# Altium PCB DAQ_1.PcbDoc
Units mm, origin at the board's own origin, x right, y up, seen from the top; angles counter-clockwise.
Board outline 50 x 50 mm, 2 copper layers (Top Layer, Bottom Layer); 40 components, 35 nets, 126 pads, 0 vias.
Unrouted connection lines stored in the file: 81.
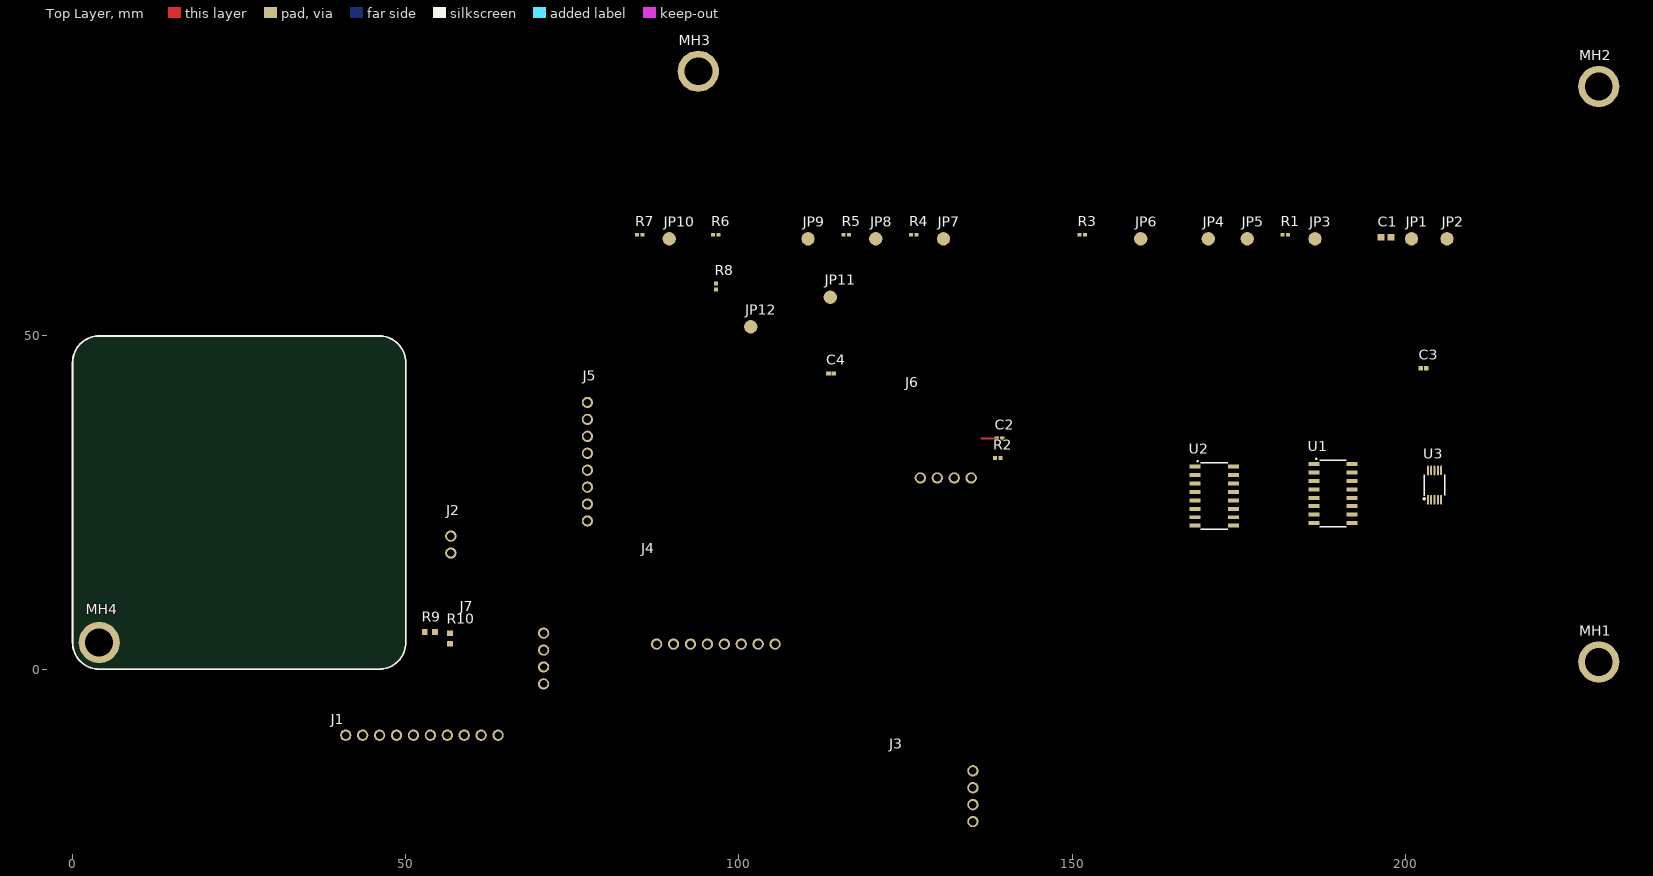
[diagram p0: Top Layer view]
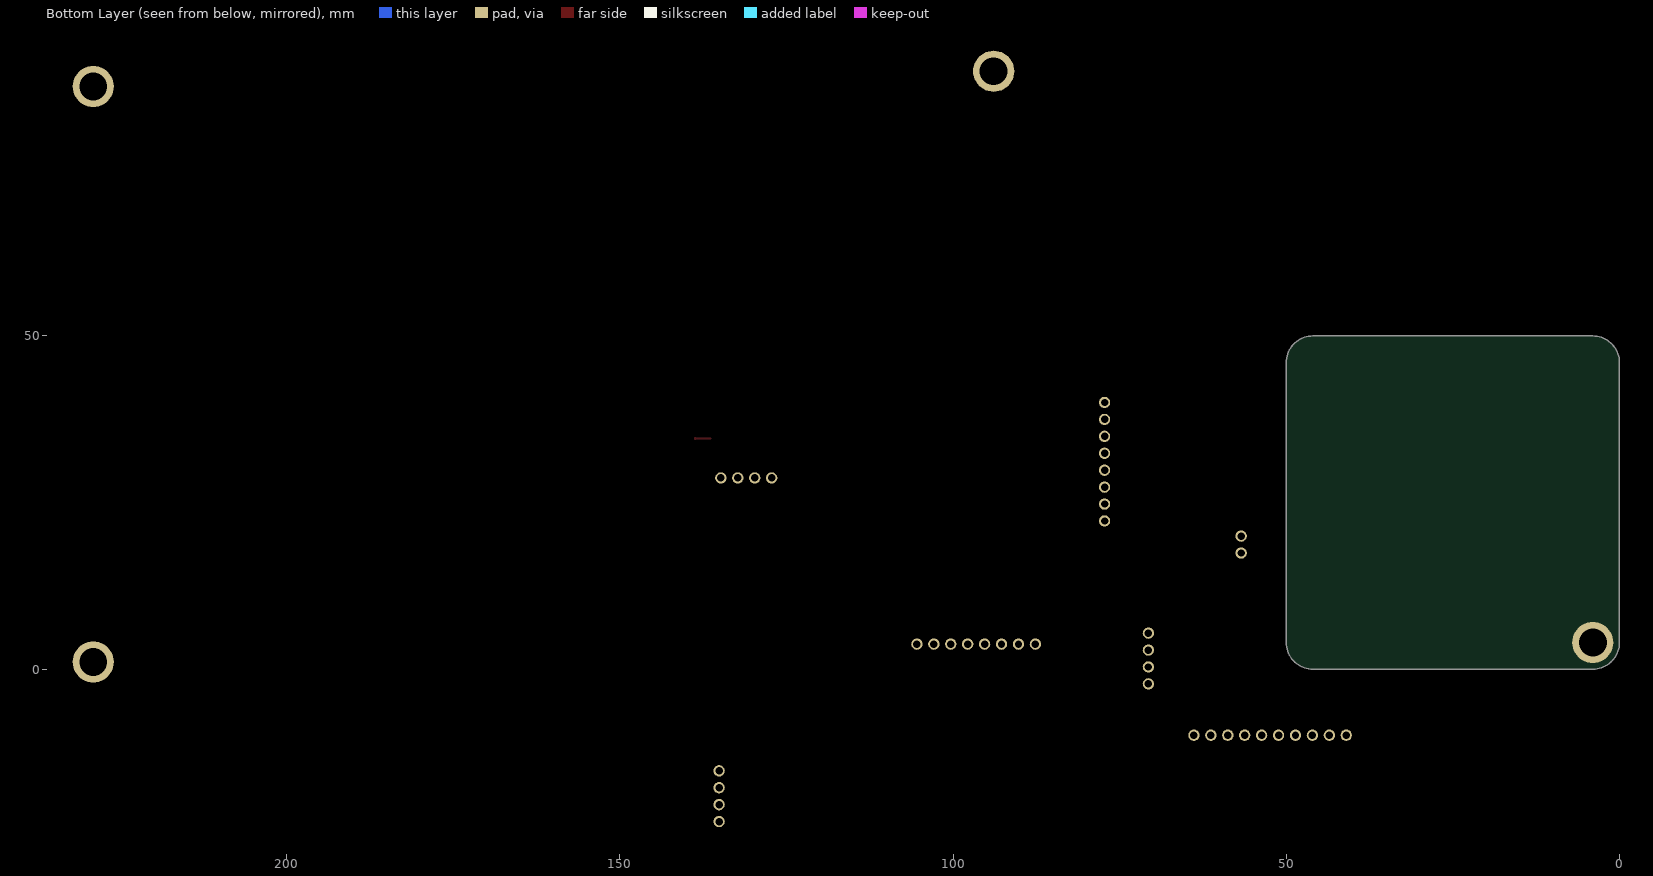
[diagram p1: Bottom Layer view, seen from below]

## Layer stack, top to bottom
Top Solder: solder mask 0.0102, Solder Resist, Dk 3.5
Top Layer: signal copper 0.0356
Dielectric 1: dielectric 0.32, FR-4, Dk 4.8
Bottom Layer: signal copper 0.0356
Bottom Solder: solder mask 0.0102, Solder Resist, Dk 3.5

## Board outline
0,4 0,46 cw(c4,46) 4,50 46,50 cw(c46,46) 50,46 50,4 cw(c46,4) 46,0 4,0 cw(c4,4)

## Design rules (kind name [scope] priority, off if disabled: settings)
BoardOutlineClearance [All] p1: gap=0.2 ignorepadtopadclearanceinfootprint=FALSE
Clearance "Stitching HV_GND" [IsStitchingVia and InNet('HV_GND') vs (IsVia and (Not IsStitchingVia)) Or IsPad] p1: gap=0.127 ignorepadtopadclearanceinfootprint=FALSE
Clearance [All] p2: gap=0.127 ignorepadtopadclearanceinfootprint=FALSE except(0.2: Arc-SMDPad Track-SMDPad; 0.25: Arc-Hole Track-Hole SMDPad-Hole THPad-Hole Via-Hole Fill-Hole Poly-Hole Region-Hole Text-Hole; 0.254: Arc-Via Track-Via Via-Via; 0.33: Arc-THPad Track-THPad; 0.54: SMDPad-THPad THPad-THPad)
ComponentClearance [All] p1: gap=0.127 collisioncheckmode=3 verticalgap=0.127 showdistances=TRUE
DiffPairsRouting [All] p1: maxlimit=0.254 minlimit=0.127 mostfreqgap=0.127 toplayer_minwidth=0.127 toplayer_maxwidth=25.4 toplayer_prefwidth=0.127 bottomlayer_minwidth=0.127 bottomlayer_maxwidth=25.4 bottomlayer_prefwidth=0.127 maxuncoupledlength=12.7
Height [All] p1: minheight=0 maxheight=1816.048 prefheight=12.7
HoleSize [All] p1: absolutevalues=TRUE maxlimit=6.3 minlimit=0.3 maxpercent=80.000 minpercent=20.000
HoleToHoleClearance [All] p1: gap=0.25 allowstackedmicrovias=FALSE
MinimumAnnularRing [All] p1: minimumring=0.076
MinimumSolderMaskSliver [All] p1: minsoldermaskwidth=0
PlaneClearance [All] p1: clearance=0.127
PlaneConnect PlaneConnectPowerPads [InPadClass('PowerPads')] p1: planeconnectstyle=Direct reliefexpansion=0.508 reliefentries=4 reliefconductorwidth=0.254 reliefairgap=0.254
PlaneConnect [All] p2: pad.planeconnectstyle=Relief pad.reliefexpansion=0.3 pad.reliefentries=4 pad.reliefconductorwidth=0.254 pad.reliefairgap=0.127 via.planeconnectstyle=Direct via.reliefexpansion=0.3 via.reliefentries=4 via.reliefconductorwidth=0.127 via.reliefairgap=0.127
PolygonConnect PolygonConnectPowerPads [All vs (InPadClass('PowerPads'))] p1: connectstyle=Direct reliefconductorwidth=0.254 reliefentries=4 polygonreliefangle="90 Angle" airgapwidth=0.254
PolygonConnect [All] p2: thpad.connectstyle=Relief thpad.reliefconductorwidth=0.203 thpad.reliefentries=4 thpad.polygonreliefangle="90 Angle" thpad.airgapwidth=0.254 smdpad.connectstyle=Relief smdpad.reliefconductorwidth=0.203 smdpad.reliefentries=4 smdpad.polygonreliefangle="90 Angle" smdpad.airgapwidth=0.254 via.connectstyle=Direct via.reliefconductorwidth=0.203 via.reliefentries=4 via.polygonreliefangle="90 Angle" via.airgapwidth=0.254
RoutingVias [All] p1: holewidth=0.45 width=0.75 viastyle="Through Hole" minholewidth=0.3 minwidth=0.6 maxholewidth=0.6 maxwidth=6.6
SilkToSilkClearance [All] p1: silktosilkclearance=0
SilkToSolderMaskClearance [IsPad] p1: minsilkscreentomaskgap=0.127 clearancetoexposedcopper=TRUE
SolderMaskExpansion SolderMaskExpansion_Via [IsVia] p1: expansion=0.102 istentingtop=TRUE
SolderMaskExpansion [All] p2: expansion=0.075 istentingtop=FALSE
Width [All] p1: maxlimit=25.4 minlimit=0.2 preferedwidth=0.406 minimp=50.000000 maximp=50.000000 favimp=50.000000
20 further rules are at their usual default settings.

## Classes and differential pairs
component class root: C1 C2 C3 J1 J2 J3 J5 J7 JP1 JP2 JP3 JP4 JP5 JP6 JP7 JP8 JP9 JP10 JP11 JP12 MH1 MH2 MH3 MH4 R3 R4 R5 R6 R7 R8 U1 U2

## Components (designator, comment, footprint, x,y, rotation, side; value= is the part's Value field where it differs from the comment)
C1 "1uF" CAP-0603 197.107,64.836 r0 top
C2 "0.1uF" CAP-0402 139.106,34.61 r180 top
C3 "0.1uF" CAP-0402 202.733,45.151 r0 top
C4 "0.1uF" CAP-0402 113.833,44.389 r0 top
J1 "WM4932-ND" 10PIN 40.99,-9.91 r0 top
J2 "WM4153-ND" 2PIN 56.76,17.43 r90 top
J3 "WM4902-ND" 4PIN 135.1,-15.25 r270 top
J4 "23-0705530112-ND" 8PIN 105.42,3.76 r180 top
J5 "23-0705530112-ND" 8PIN 77.26,22.24 r90 top
J6 "WM4902-ND" 4PIN 134.84,28.7 r180 top
J7 "WM4902-ND" 4PIN 70.68,5.41 r270 top
JP1 "Testpoint2" TP2 200.917,64.582 r0 top
JP2 "Testpoint2" TP2 206.251,64.582 r0 top
JP3 "Testpoint2" TP2 186.439,64.582 r0 top
JP4 "Testpoint2" TP2 170.437,64.582 r0 top
JP5 "Testpoint2" TP2 176.279,64.582 r0 top
JP6 "Testpoint2" TP2 160.277,64.582 r0 top
JP7 "Testpoint2" TP2 130.686,64.582 r0 top
JP8 "Testpoint2" TP2 120.526,64.582 r0 top
JP9 "Testpoint2" TP2 110.366,64.582 r0 top
JP10 "Testpoint2" TP2 89.538,64.582 r90 top
JP11 "Testpoint2" TP2 113.706,55.819 r90 top
JP12 "Testpoint2" TP2 101.768,51.374 r90 top
MH1 "MountingHole" MH4.2MM#1 229.022,1.082 r0 top
MH2 "MountingHole" MH4.2MM#1 229.022,87.442 r0 top
MH3 "MountingHole" MH4.2MM#1 93.894,89.728 r0 top
MH4 "MountingHole" MH4.2MM#2 9.23,6.75 r0 top
R1 "330R" RES-0402 181.994,65.217 r0 top
R2 "330R" RES-0402 138.852,31.689 r0 top
R3 "330R" RES-0402 151.514,65.217 r0 top
R4 "330R" RES-0402 126.241,65.217 r0 top
R5 "330R" RES-0402 116.081,65.217 r0 top
R6 "330R" RES-0402 96.523,65.217 r0 top
R7 "330R" RES-0402 85.093,65.217 r0 top
R8 "330R" RES-0402 96.561,57.426 r90 top
R9 "5K" RES-0603 53.6,5.6 r0 top
R10 "5K" RES-0603 56.6,4.6 r90 top
U1 "74HCT151" SOT127P400X1000-16N 189.144,26.355 r0 top
U2 "74HCT153" SOT127P400X1000-16N 171.318,25.974 r0 top
U3 "ADS1113" VSSOP50P310X310-10P 204.384,27.625 r90 top

## Footprints (in the part's own frame and the unit in brackets; to place one, negate y for a bottom-side part, rotate by r counter-clockwise, add the part's x,y. Pads: shape width x height; smd on the part's side, far side on the other; paste and mask are expansions set on the pad)
2PIN [mm]
  round 1.7 hole 1.11: 1(0,0) 2(2.54,0)
  body extent -2.48,-12.89 4.88,0.7, height 7.06
4PIN [mm]
  round 1.7 hole 1.11: 1(0,0) 2(2.54,0) 3(5.08,0) 4(7.62,0)
  body extent -2.55,-12.82 10.15,0.77, height 7.06
8PIN [mm]
  round 1.7 hole 1.11: 1(0,0) 2(2.54,0) 3(5.08,0) 4(7.62,0) 5(10.16,0) 6(12.7,0) 7(15.24,0) 8(17.78,0)
  body extent -2.56,-12.89 20.3,0.7, height 7.06
10PIN [mm]
  round 1.7 hole 1.11: 1(0,0) 2(2.54,0) 3(5.08,0) 4(7.62,0) 5(10.16,0) 6(12.7,0) 7(15.24,0) 8(17.78,0) 9(20.32,0) 10(22.86,0)
  body extent -2.54,-12.89 25.4,0.69, height 7.06
CAP-0402 [mm] "Chip Capacitor, 2-Leads, Body 1.00x0.50mm, IPC Medium Density"
  rect 0.7x0.62 smd: 1(-0.41,0) 2(0.41,0)
  body extent -0.53,-0.28 0.53,0.28, height 0.55
CAP-0603 [mm] "Chip Capacitor, 2-Leads, Body 1.60x0.80mm, IPC Medium Density"
  rect 1.05x1 smd: 1(-0.75,0) 2(0.75,0)
  body extent -0.87,-0.48 0.87,0.48, height 0.9
MH4.2MM#1 [mm] "Mounting Hole, 4.2mm"
  round 6.2 hole 4.2: 1(0,0)
MH4.2MM#2 [mm] "Mounting Hole, 4.2mm"
  round 6.2 hole 4.2: 1(-5.23,-2.75)
RES-0402 [mm] "Chip Resistor, 2-Leads, Body 1.00x0.50mm, IPC Medium Density"
  rect 0.6x0.55 smd: 1(-0.425,0) 2(0.425,0)
  body extent -0.53,-0.28 0.53,0.28, height 0.4
RES-0603 [mm] "Chip Resistor, 2-Leads, Body 1.60x0.80mm, IPC Medium Density"
  rect 0.85x0.9 smd: 1(-0.775,0) 2(0.775,0)
  body extent -0.85,-0.45 0.85,0.45, height 0.55
SOT127P400X1000-16N [mm] "SOT109, 16-Leads, Body 4x10mm (max), Pitch 1.27mm, IPC Medium Density"
  rect 1.65x0.6 smd mask+0.07: 1(-2.875,4.445) 2(-2.875,3.175) 3(-2.875,1.905) 4(-2.875,0.635) 5(-2.875,-0.635) 6(-2.875,-1.905) 7(-2.875,-3.175) 8(-2.875,-4.445) 9(2.875,-4.445) 10(2.875,-3.175) 11(2.875,-1.905) 12(2.875,-0.635) 13(2.875,0.635) 14(2.875,1.905) 15(2.875,3.175) 16(2.875,4.445)
  silkscreen extent -2.58,-5 2,5.32, body extent -2.01,-5 1.99,4.99, height 0.95
TP2 [mm]
  round 2 smd: 1(0,0)
VSSOP50P310X310-10P [mm] "VSSOP, 10-Leads, Body 3.1x3.1mm (max), Pitch 0.50mm, IPC Low Density"
  oval 1.45x0.3 smd: 1(-2.2,1) 2(-2.2,0.5) 3(-2.2,0) 4(-2.2,-0.5) 5(-2.2,-1) 6(2.2,-1) 7(2.2,-0.5) 8(2.2,0) 9(2.2,0.5) 10(2.2,1)
  silkscreen extent -2.17,-1.55 1.55,1.67, body extent -1.55,-1.55 1.55,1.55, height 1.1

## Part data
C1: library part 0603-1uF-16V, "CAP CER 1UF 16V X7R 0603", Case Code (Imperial)=0603, Case Code (Metric)=1608, Dielectric=X7R, Dielectric Material=Ceramic, Manufacturer=KEMET, Manufacturer Part Number=C0603C105K4RACTU, Max Operating Temperature=125°C, Min Operating Temperature=-55°C, Package Quantity=4000, Supplier Part Number 1=399-7847-6-ND, Tolerance=10%, Voltage=16V, Capacitance=1uF, Case/Package=0603, ComponentLink1Description=http://www.mouser.com/ds/2/212/KEM_C1002_X7R_SMD-1102033.pdf?src-supplier=Mouser, ComponentLink1URL=http://www.mouser.com/ds/2/212/KEM_C1002_X7R_SMD-1102033.pdf?src-supplier=Mouser, ComponentLink2Description=http://www.kemet.com/kemet/web/homepage/kechome.nsf/file/Commercial%20Ceramic%20Chips%20X7R%20Dielectric/$file/KEM_C1002_X7R_SMD.pdf?src-supplier=Element14, ComponentLink2URL=http://www.kemet.com/kemet/web/homepage/kechome.nsf/file/Commercial%20Ceramic%20Chips%20X7R%20Dielectric/$file/KEM_C1002_X7R_SMD.pdf?src-supplier=Element14, ComponentLink3Description=https://www.verical.com/server-webapp/html/getDatasheet?partID=385479&src-supplier=Verical, ComponentLink3URL=https://www.verical.com/server-webapp/html/getDatasheet?partID=385479&src-supplier=Verical, ComponentLink4Description=http://www.kemet.com/kemet/web/homepage/kechome.nsf/vapubfiles/KEM_C1002_X7R_SMD.pdf/$file/KEM_C1002_X7R_SMD.pdf?src-supplier=Element14, ComponentLink4URL=http://www.kemet.com/kemet/web/homepage/kechome.nsf/vapubfiles/KEM_C1002_X7R_SMD.pdf/$file/KEM_C1002_X7R_SMD.pdf?src-supplier=Element14, Contact Plating=Tin,Matte, Depth=0.8mm, Dissipation Factor=3.5%, Height=0.8mm, Length=1.6mm, Mount="Surface Mount,PCB", Number of Pins=2, Packaging="Tape and Reel", Pricing 1="1=0.12, 10=0.088, 100=0.0391, 500=0.02792, 1000=0.02193 (USD)", Radiation Hardening=No, REACH SVHC="No SVHC", Stock 1=600463, Supplier 1=Digi-Key, Termination=SMD/SMT, Thickness=0.034inch, Voltage Rating=16V, Voltage Rating (DC)=16V, Width=0.031inch
C2 C3 C4: library part 0402-0.1uF-16V, "CAP CER 0.1UF 16V Y5V 0402", Capacitance=100nF, Case/Package=0402, Dielectric=Y5V, Dielectric Material=Ceramic, Manufacturer=KEMET, Manufacturer Part Number=C0402C104Z4VACTU, Max Operating Temperature=85°C, Min Operating Temperature=-30°C, Supplier Part Number 1=399-1043-6-ND, Tolerance=80%, Voltage Rating (DC)=16V, ComponentLink1Description=https://www.verical.com/server-webapp/html/getDatasheet?partID=764272&src-supplier=Verical, ComponentLink1URL=https://www.verical.com/server-webapp/html/getDatasheet?partID=764272&src-supplier=Verical, Depth=0.5mm, Height=0.5mm, Lead Free="Lead Free", Length=1mm, Mount="Surface Mount", Packaging="Tape and Reel", Pricing 1="1=0.1, 10=0.018, 100=0.0081, 500=0.00578, 1000=0.00454, 2500=0.00412, 5000=0.0038 (USD)", Radiation Hardening=No, Stock 1=1836776, Supplier 1=Digi-Key
J1: library part 10PIN, "CONN HEADER R/A 10POS 2.54MM", Color=Black, Contact Resistance=30mR, Manufacturer=Molex, Manufacturer Part Number=0705530044, Max Operating Temperature=105°C, Min Operating Temperature=-40°C, ComponentLink1Description=http://www.molex.com/webdocs/datasheets/pdf/en-us/0705530044_PCB_HEADERS.pdf?src-supplier=Avnet, ComponentLink1URL=http://www.molex.com/webdocs/datasheets/pdf/en-us/0705530044_PCB_HEADERS.pdf?src-supplier=Avnet, Connector Type="Male Pin", Contact Material=Bronze, Contact Mating Length=0.24inch, Contact Plating=Tin, Depth=13.59mm, Gender=Male, Housing Color=Black, Housing Material=Polyester, Length=27.95mm, Mount="Through Hole", Number of Contacts=10, Number of Positions=10, Number of Rows=1, Orientation="Right Angle", Packaging=Rail/Tube, Pitch=2.54mm, Pricing 1="1=2.61, 10=2.367, 100=2.0288, 500=1.69068, 1000=1.44915, 5000=1.28491 (USD)", Stock 1=1173, Supplier 1=Digi-Key, Supplier Part Number 1=WM4932-ND, Termination=Solder
J2: library part 2PIN, "CONN HEADER R/A 2POS 2.54MM", Color=Black, Contact Resistance=30mR, Manufacturer=Molex, Manufacturer Part Number=0705530106, Max Operating Temperature=105°C, Min Operating Temperature=-40°C, ComponentLink1Description=http://www.molex.com/webdocs/datasheets/pdf/en-us/0705530106_PCB_HEADERS.pdf?src-supplier=Avnet+Asia, ComponentLink1URL=http://www.molex.com/webdocs/datasheets/pdf/en-us/0705530106_PCB_HEADERS.pdf?src-supplier=Avnet+Asia, ComponentLink2Description=https://www.molex.com/pdm_docs/ps/PS-70400.pdf?src-supplier=Digi-Key, ComponentLink2URL=https://www.molex.com/pdm_docs/ps/PS-70400.pdf?src-supplier=Digi-Key, Connector Type="Male Pin", Contact Material=Bronze, Contact Mating Length=0.24inch, Contact Plating=Gold, Depth=13.59mm, Housing Color=Black, Housing Material=Polyester, Length=7.37mm, Mount="Through Hole", Number of Contacts=2, Number of Positions=2, Number of Rows=1, Orientation="Right Angle", Packaging=Rail/Tube, Pitch=2.54mm, Pricing 1="1=1.38, 10=1.25, 100=1.071, 500=0.8925, 1000=0.765, 5000=0.6783, 10000=0.663 (USD)", Stock 1=2224, Supplier 1=Digi-Key, Supplier Part Number 1=WM4153-ND, Termination=Solder
J3 J6 J7: library part 4PIN, "CONN HEADER R/A 4POS 2.54MM", Color=Black, Contact Resistance=30mR, Current Rating=3A, Flammability Rating="UL94 V-0", Insulation Resistance=1GR, Manufacturer=Molex, Manufacturer Part Number=70553-0003, Max Operating Temperature=105°C, Min Operating Temperature=-40°C, Package Quantity=1680, Voltage Rating=250V, Approvals=UL,CSA, ComponentLink1Description=http://www.molex.com/webdocs/datasheets/pdf/en-us/0705530003_PCB_HEADERS.pdf?src-supplier=Mouser, ComponentLink1URL=http://www.molex.com/webdocs/datasheets/pdf/en-us/0705530003_PCB_HEADERS.pdf?src-supplier=Mouser, ComponentLink2Description=http://www.jameco.com/Jameco/Products/ProdDS/884758.pdf?src-supplier=Jameco, ComponentLink2URL=http://www.jameco.com/Jameco/Products/ProdDS/884758.pdf?src-supplier=Jameco, ComponentLink3Description=http://uk.rs-online.com/webdocs/13c4/0900766b813c4977.pdf?src-supplier=RSComponents, ComponentLink3URL=http://uk.rs-online.com/webdocs/13c4/0900766b813c4977.pdf?src-supplier=RSComponents, Contact Material="Bronze,Copper Alloy", Contact Plating=Gold, ELV=Compliant, Gender=Male, Glow Wire Compliant=Non-compliant, Housing Color=Black, Housing Material=Polycyclohexylenedimethylene, Lead Free="Lead Free", Material=Brass, Mount="Through Hole", Number of Circuits=4, Number of Contacts=4, Number of Positions=4, Number of Rows=1, Orientation="Right Angle", Packaging=Rail/Tube, Pitch=2.54mm, Pricing 1="1=1.05, 10=0.927, 100=0.7995, 500=0.65412, 1000=0.58144, 5000=0.50876, 10000=0.48332 (USD)", REACH SVHC=Unknown, Stock 1=4238, Supplier 1=Digi-Key, Supplier Part Number 1=WM4902-ND, Termination="Through Hole", Voltage Rating (DC)=250V
J4 J5: library part 8PIN, "CONN HEADER R/A 8POS 2.54MM", Color=Black, Contact Resistance=30mR, Current Rating=3A, Flammability Rating="UL94 V-0", Insulation Resistance=1GR, Manufacturer=Molex, Manufacturer Part Number=70553-0112, Max Operating Temperature=105°C, Min Operating Temperature=-40°C, Package Quantity=1, Voltage Rating=250V, ComponentLink1Description=https://www.molex.com/pdm_docs/ps/PS-70400.pdf?src-supplier=Digi-Key, ComponentLink1URL=https://www.molex.com/pdm_docs/ps/PS-70400.pdf?src-supplier=Digi-Key, ComponentLink2Description=http://www.mouser.com/ds/2/276/0705530112_PCB_HEADERS-172840.pdf?src-supplier=Mouser, ComponentLink2URL=http://www.mouser.com/ds/2/276/0705530112_PCB_HEADERS-172840.pdf?src-supplier=Mouser, Connector Type="Male Pin", Contact Material=Bronze, Contact Mating Length=0.24inch, Contact Plating=Gold, ELV=Compliant, Glow Wire Compliant=Non-compliant, Housing Material=Thermoplastic, Material=Brass, Mount="Through Hole", Number of Circuits=8, Number of Contacts=8, Number of Positions=8, Number of Rows=1, Orientation="Right Angle", Packaging=Rail/Tube, Pitch=2.54mm, Pricing 1="1=2.43, 10=2.205, 100=1.89, 500=1.575, 1000=1.35, 5000=1.197, 10000=1.17 (USD)", Stock 1=1363, Supplier 1=Digi-Key, Supplier Part Number 1=23-0705530112-ND, Termination=Solder, Voltage Rating (DC)=250V
JP1 JP2 JP3 JP4 JP5 JP6 JP7 JP8 JP9 JP10 JP11 JP12: "Single layer pad TP"
MH1 MH2 MH3 MH4: library part MH4.2mm, "Mounting hole, 4.2mm", Case=TH
R1 R2 R3 R4 R5 R6 R7 R8: library part 0402-330R, "RES SMD 330R OHM 5% 1/10W 0402", ComponentLink1Description=https://industrial.panasonic.com/cdbs/www-data/pdf/RDA0000/AOA0000C301.pdf?src-supplier=Future+Electronics, ComponentLink1URL=https://industrial.panasonic.com/cdbs/www-data/pdf/RDA0000/AOA0000C301.pdf?src-supplier=Future+Electronics, ComponentLink2Description=http://www.jameco.com/Jameco/Products/ProdDS/1986781.pdf?src-supplier=Jameco, ComponentLink2URL=http://www.jameco.com/Jameco/Products/ProdDS/1986781.pdf?src-supplier=Jameco, ComponentLink3Description=http://www.farnell.com/datasheets/2059623.pdf?src-supplier=Farnell, ComponentLink3URL=http://www.farnell.com/datasheets/2059623.pdf?src-supplier=Farnell, ComponentLink4Description=http://industrial.panasonic.com/www-data/pdf/AOA0000/AOA0000CE1.pdf?src-supplier=Avnet, ComponentLink4URL=http://industrial.panasonic.com/www-data/pdf/AOA0000/AOA0000CE1.pdf?src-supplier=Avnet, ComponentLink5Description=http://www.alliedelec.com/m/d/51cd0790071e1666bdb9d00c57fcf960.pdf?src-supplier=Allied+Electronics, ComponentLink5URL=http://www.alliedelec.com/m/d/51cd0790071e1666bdb9d00c57fcf960.pdf?src-supplier=Allied+Electronics, ComponentLink6Description=http://industrial.panasonic.com/www-data/pdf/AOA0000/AOA0000CE1.pdf?src-supplier=Avnet+Europe, ComponentLink6URL=http://industrial.panasonic.com/www-data/pdf/AOA0000/AOA0000CE1.pdf?src-supplier=Avnet+Europe, ComponentLink7Description=http://www.farnell.com/datasheets/2059623.pdf?src-supplier=Element14, ComponentLink7URL=http://www.farnell.com/datasheets/2059623.pdf?src-supplier=Element14, ComponentLink8Description=http://industrial.panasonic.com/cdbs/www-data/pdf/RDA0000/AOA0000C301.pdf?src-supplier=Farnell, ComponentLink8URL=http://industrial.panasonic.com/cdbs/www-data/pdf/RDA0000/AOA0000C301.pdf?src-supplier=Farnell
R9 R10: library part 0603-5KR, "RES SMD 4.99K OHM 1% 1/10W 0603", Case Code (Imperial)=0603, Case Code (Metric)=1608, Manufacturer=Bourns, Manufacturer Part Number=CR0603-FX-4991ELF, Max Operating Temperature=155°C, Max Power Dissipation=100mW, Min Operating Temperature=-55°C, Package Quantity=1, Resistance=4.99kR, Supplier Part Number 1=CR0603-FX-4991ELFDKR-ND, Temperature Coefficient=100ppm/°C, Tolerance=1%, Voltage Rating=50V, Case/Package=0603, ComponentLink1Description=https://www.bourns.com/docs/Product-Datasheets/CHPREZTR.pdf?src-supplier=Digi-Key, ComponentLink1URL=https://www.bourns.com/docs/Product-Datasheets/CHPREZTR.pdf?src-supplier=Digi-Key, ComponentLink2Description=http://www.bourns.com/pdfs/chpreztr.pdf?src-supplier=Avnet, ComponentLink2URL=http://www.bourns.com/pdfs/chpreztr.pdf?src-supplier=Avnet, Composition="Thick Film", Contact Plating=Tin, Features="Moisture Resistant", Height=0.022inch, Length=0.063inch, Mount="Surface Mount", Number of Terminations=2, Packaging="Tape and Reel", Power Rating=100mW, Pricing 1="1=0.1, 10=0.02, 25=0.0144, 50=0.011, 100=0.0082, 250=0.00624, 500=0.00498, 1000=0.00367 (USD)", Radiation Hardening=No, Stock 1=70557, Supplier 1=Digi-Key, Termination=SMD/SMT, Thickness=457um, Width=0.8mm
U1: library part IC_74HCT151, "8-input multiplexer"
U2: library part IC_74HCT153, "Dual 4-input multiplexer"
U3: library part IC_ADS111x, "ADS111x Ultra-Small, Low-Power, I / 2C-Compatible, 860-SPS, 16-Bit ADCs / With Internal Reference, Oscillator, and Programmable Comparator"

## Nets (pads, with @x,y where several pads share a name; then routed paths per layer and width w, separated by ;. In a path a pad name is that pad's centre, name@x,y a point inside that pad or via, vN(x,y) a via of type N, cw(c..) or ccw(c..) an arc to the next point about the centre after c; other vN are vias at no path point)
+5: J6.1 J7.1
ADC_ADDR: JP12.1 R8.1 U3.1
D+5V: C1.2 C2.2 C3.2 C4.2 J2.1 J5.1 J5.2 J5.3 J5.4 J5.5 J5.6 J5.7 J5.8 JP1.1 R9.2 R10.2 U1.16 U2.16 U3.8 | length 2.3
  Top Layer w0.254: 136.353,34.61 C2.2
GND: C1.1 C2.1 C3.1 C4.1 J2.2 J6.4 J7.4 JP4.1 MH1.1 MH2.1 MH3.1 MH4.1 U1.7 U1.8 U2.1 U2.8 U3.3
NetJ1_3: J1.3 R1.2
NetJ1_4: J1.4 R2.2
NetJ1_5: J1.5 R3.2
NetJ1_6: J1.6 R4.2
NetJ1_7: J1.7 R5.2
NetJ1_8: J1.8 R6.2
NetJ1_9: J1.9 R7.2
NetJ1_10: J1.10 R8.2
RX: J7.3 JP11.1 R7.1
SCL: J1.1 J6.2 JP2.1 R9.1 U3.10
SDA: J1.2 J6.3 JP3.1 R10.1 U3.9
SHOCK_1: J3.1 U2.6
SHOCK_2: J3.2 U2.5
SHOCK_3: J3.3 U2.4
SHOCK_4: J3.4 U2.3
SHOCK_MUX: U2.7 U3.4
SHOCK_S0: JP8.1 R4.1 U2.14
SHOCK_S1: JP9.1 R5.1 U2.2
TEMP_1: J4.1 U1.4
TEMP_2: J4.2 U1.3
TEMP_3: J4.3 U1.2
TEMP_4: J4.4 U1.1
TEMP_5: J4.5 U1.15
TEMP_6: J4.6 U1.14
TEMP_7: J4.7 U1.13
TEMP_8: J4.8 U1.12
TEMP_MUX: U1.5 U3.5
TEMP_S0: JP5.1 R1.1 U1.11
TEMP_S1: JP6.1 R2.1 U1.10
TEMP_S2: JP7.1 R3.1 U1.9
TX: J7.2 JP10.1 R6.1
pads on no net: U1.6 U2.9 U2.10 U2.11 U2.12 U2.13 U2.15 U3.2 U3.6 U3.7

## Silkscreen, mask and mechanical layers (free items; w line width, h text height)
Top Overlay:
  the board outline again, w0.254